# EAGLE board CT_schematic (EAGLE 7.6.0)

Size 100 x 80 mm. Coordinates in mm from the lower left corner, seen from the top.
Outline: 0,0 100,0 100,80 0,80 0,0
Copper layers (1*16): Top 0.035mm / dielectric 1.5mm / Bottom 0.035mm
Design rules "default": minimum track width 10mil, minimum drill 24mil, track to track 8mil, track to pad 8mil, pad to pad 8mil, via to via 8mil, smd to smd 8mil, copper to edge 40mil, drill to drill 8mil, minimum pad ring 10mil, minimum via ring 8mil, stop-mask expansion 4mil, vias tented up to drill 0mil, thermal gap 10mil

## Footprints (pad centres in the part's own frame; a part is rotated, then mirrored left to right if it is on the bottom)
C0603 = smd 0.8 x 0.8: 1 -0.762,0; 2 0.762,0
C0402 = smd 0.5 x 0.5: 1 -0.508,0; 2 0.508,0
C0805 = smd 1.2 x 1.3: 1 -1.016,0; 2 1.016,0
C1210 = smd 1.2 x 2.5: 1 -1.524,0; 2 1.524,0
EXV-9H = smd 3.505 x 1.676: 1 -2.857,0; 2 2.857,0
L0603 = smd 0.8 x 0.8: 1 -0.762,0; 2 0.762,0
PJ-037B_PACKAGE = drill 3.7 square: 1 12,0 | drill 3.2 square: 2 6,0
R0603 = smd 0.8 x 0.8: 1 -0.762,0; 2 0.762,0
LQFP144 = smd 0.35 x 1.35: 1 -8.75,-10.625; 2 -8.25,-10.625; 3 -7.75,-10.625; 4 -7.25,-10.625; 5 -6.75,-10.625; 6 -6.25,-10.625; 7 -5.75,-10.625; 8 -5.25,-10.625; 9 -4.75,-10.625; 10 -4.25,-10.625; 11 -3.75,-10.625; 12 -3.25,-10.625; 13 -2.75,-10.62; 14 -2.25,-10.625; 15 -1.75,-10.625; 16 -1.25,-10.625; 17 -0.75,-10.625; 18 -0.25,-10.625; 19 0.25,-10.625; 20 0.75,-10.625; 21 1.25,-10.625; 22 1.75,-10.625; 23 2.25,-10.625; 24 2.75,-10.62; 25 3.25,-10.625; 26 3.75,-10.625; 27 4.25,-10.625; 28 4.75,-10.625; 29 5.25,-10.625; 30 5.75,-10.625; 31 6.25,-10.625; 32 6.75,-10.625; 33 7.25,-10.625; 34 7.75,-10.625; 35 8.25,-10.625; 36 8.75,-10.625; 73 8.75,10.625; 74 8.25,10.625; 75 7.75,10.625; 76 7.25,10.625; 77 6.75,10.625; 78 6.25,10.625; 79 5.75,10.625; 80 5.25,10.625; 81 4.75,10.625; 82 4.25,10.625; 83 3.75,10.625; 84 3.25,10.625; 85 2.75,10.625; 86 2.25,10.625; 87 1.75,10.625; 88 1.25,10.625; 89 0.75,10.625; 90 0.25,10.625; 91 -0.25,10.625; 92 -0.75,10.625; 93 -1.25,10.625; 94 -1.75,10.625; 95 -2.25,10.625; 96 -2.75,10.625; 97 -3.25,10.625; 98 -3.75,10.625; 99 -4.25,10.625; 100 -4.75,10.625; 101 -5.25,10.625; 102 -5.75,10.625; 103 -6.25,10.625; 104 -6.75,10.625; 105 -7.25,10.625; 106 -7.75,10.625; 107 -8.25,10.625; 108 -8.75,10.625 | smd 1.35 x 0.35: 37 10.625,-8.75; 38 10.625,-8.25; 39 10.625,-7.75; 40 10.625,-7.25; 41 10.625,-6.75; 42 10.625,-6.25; 43 10.625,-5.75; 44 10.625,-5.25; 45 10.625,-4.75; 46 10.625,-4.25; 47 10.625,-3.75; 48 10.625,-3.25; 49 10.625,-2.75; 50 10.625,-2.25; 51 10.625,-1.75; 52 10.625,-1.25; 53 10.625,-0.75; 54 10.625,-0.25; 55 10.625,0.25; 56 10.625,0.75; 57 10.625,1.25; 58 10.625,1.75; 59 10.625,2.25; 60 10.625,2.75; 61 10.625,3.25; 62 10.625,3.75; 63 10.625,4.25; 64 10.625,4.75; 65 10.625,5.25; 66 10.625,5.75; 67 10.625,6.25; 68 10.625,6.75; 69 10.625,7.25; 70 10.625,7.75; 71 10.625,8.25; 72 10.625,8.75; 109 -10.625,8.75; 110 -10.625,8.25; 111 -10.625,7.75; 112 -10.625,7.25; 113 -10.625,6.75; 114 -10.625,6.25; 115 -10.625,5.75; 116 -10.625,5.25; 117 -10.625,4.75; 118 -10.625,4.25; 119 -10.625,3.75; 120 -10.625,3.25; 121 -10.625,2.75; 122 -10.625,2.25; 123 -10.625,1.75; 124 -10.625,1.25; 125 -10.625,0.75; 126 -10.625,0.25; 127 -10.625,-0.25; 128 -10.625,-0.75; 129 -10.625,-1.25; 130 -10.625,-1.75; 131 -10.625,-2.25; 132 -10.625,-2.75; 133 -10.625,-3.25; 134 -10.625,-3.75; 135 -10.625,-4.25; 136 -10.625,-4.75; 137 -10.625,-5.25; 138 -10.625,-5.75; 139 -10.625,-6.25; 140 -10.625,-6.75; 141 -10.625,-7.25; 142 -10.625,-7.75; 143 -10.625,-8.25; 144 -10.625,-8.75
SOT-23-8 = smd 0.4 x 1.2: 1 -0.975,-1.3; 2 -0.325,-1.3; 3 0.325,-1.3; 4 0.975,-1.3; 5 0.975,1.3; 6 0.325,1.3; 7 -0.325,1.3; 8 -0.975,1.3
182-009-MALE = drill 1.194 pad 1.524 octagon: 1 -5.537,10.923; 2 -2.769,10.923; 3 0,10.923; 4 2.769,10.923; 5 5.537,10.923; 6 -4.153,8.08; 7 -1.384,8.08; 8 1.384,8.08; 9 4.153,8.08 | hole 3.048: -12.446,9.501; 12.446,9.501
DFN8-S = smd 0.6 x 0.4: 1 -2.69,1.905; 2 -2.69,0.635; 3 -2.69,-0.635; 4 -2.69,-1.905; 5 2.69,-1.905; 6 2.69,-0.635; 7 2.69,0.635; 8 2.69,1.905
ATBTLC1000-MR110CA = smd 2 x 0.5: 1 -7.2,2.7; 2 -7.2,1.8; 3 -7.2,0.9; 4 -7.2,0; 5 -7.2,-0.9; 6 -7.2,-1.8; 7 -7.2,-2.7; 8 -7.2,-3.6; 17 3.6,-3.6; 18 3.6,-2.7; 19 3.6,-1.8; 20 3.6,-0.9; 21 3.6,0; 22 3.6,0.9; 23 3.6,1.8; 24 3.6,2.7 | smd 0.5 x 2: 9 -4.255,-6.824; 10 -3.355,-6.824; 11 -2.455,-6.824; 12 -1.555,-6.824; 13 -0.655,-6.824; 14 0.245,-6.824; 15 1.145,-6.824; 16 2.045,-6.824 | smd 2.7 x 2.7: 25 -1.261,-0.328
PC28F512P33BFD = smd 0.45 x 0.45: A1 0,0; A2 1,0; A3 2,0; A4 3,0; A5 4,0; A6 5,0; A7 6,0; A8 7,0; B1 0,-1; B2 1,-1; B3 2,-1; B4 3,-1; B5 4,-1; B6 5,-1; B7 6,-1; B8 7,-1; C1 0,-2; C2 1,-2; C3 2,-2; C4 3,-2; C5 4,-2; C6 5,-2; C7 6,-2; C8 7,-2; D1 0,-3; D2 1,-3; D3 2,-3; D4 3,-3; D5 4,-3; D6 5,-3; D7 6,-3; D8 7,-3; E1 0,-4; E2 1,-4; E3 2,-4; E4 3,-4; E5 4,-4; E6 5,-4; E7 6,-4; E8 7,-4; F1 0,-5; F2 1,-5; F3 2,-5; F4 3,-5; F5 4,-5; F6 5,-5; F7 6,-5; F8 7,-5; G1 0,-6; G2 1,-6; G3 2,-6; G4 3,-6; G5 4,-6; G6 5,-6; G7 6,-6; G8 7,-6; H1 0,-7; H2 1,-7; H3 2,-7; H4 3,-7; H5 4,-7; H6 5,-7; H7 6,-7; H8 7,-7
QFN-32 = smd 0.6 x 0.3: 1 -2.3,1.75; 2 -2.3,1.25; 3 -2.3,0.75; 4 -2.3,0.25; 5 -2.3,-0.25; 6 -2.3,-0.75; 7 -2.3,-1.25; 8 -2.3,-1.75; 17 2.3,-1.75; 18 2.3,-1.25; 19 2.3,-0.75; 20 2.3,-0.25; 21 2.3,0.25; 22 2.3,0.75; 23 2.3,1.25; 24 2.3,1.75 | smd 0.3 x 0.6: 9 -1.75,-2.3; 10 -1.25,-2.3; 11 -0.75,-2.3; 12 -0.25,-2.3; 13 0.25,-2.3; 14 0.75,-2.3; 15 1.25,-2.3; 16 1.75,-2.3; 25 1.75,2.3; 26 1.25,2.3; 27 0.75,2.3; 28 0.25,2.3; 29 -0.25,2.3; 30 -0.75,2.3; 31 -1.25,2.3; 32 -1.75,2.3 | smd 3.2 x 3.2: EXP 0,0
SJ-43515TS-SMT-TR = smd 2.2 x 3: 1 0.6,-7.4; 4 3.4,-7.4 | smd 3 x 3: 2 12.8,-7.4; 5 17,-3 | smd 2 x 3: 3 5.3,0; 6 2.5,0 | drill 1.8: P$7 4.5,-3.69; P$8 11.54,-3.69
WM-64PC = drill 0.6 pad 1: 1 -1,0.95; 2 -1,-0.95
ABS07-32.768KHZ-7-T = smd 1.1 x 2.4: 1 -2.5,0; 2 0,0
ABLS-25.000MHZ-B2F-T = smd 5.6 x 2.8: 1 -3.81,0; 2 5.69,0
ASFL1 = smd 1.7 x 1.5: 1 -1.27,-1.1; 2 1.27,-1.1; 3 1.27,1.1; 4 -1.27,1.1
WSON-8 = smd 0.3 x 0.6: 1 -0.75,0; 2 0.05,0; 3 0.85,0; 4 1.65,0; 5 1.65,3.8; 6 0.85,3.8; 7 0.05,3.8; 8 -0.75,3.8 | smd 3 x 2.6: PAD 0.45,1.9
SON-6 = smd 0.55 x 0.3: 1 -0.355,0.5 | smd 0.52 x 0.3: 2 -0.37,0; 3 -0.37,-0.5; 4 0.37,-0.5; 5 0.37,0; 6 0.37,0.5
SW_4-1437565-2 = smd 1.4 x 2.1: 1 -2.23,4.55; 2 -2.23,-4.55; 3 2.23,4.55; 4 2.23,-4.55
LGM67K-G1J2-24-Z = smd 0.8 x 1.4: A -2,0; C 0,0
NC7SZ125M5X = smd 1.3 x 0.7: 1 -1.3,0.95; 2 -1.3,0; 3 -1.3,-0.95; 4 1.3,-0.95; 5 1.3,0.95

## Placement (x,y rotation side)
C1  1e-06  [C0603]  -60.96,78.74 0 top  (outside the outline)
C2  1e-07  [C0603]  -64.77,78.74 0 top  (outside the outline)
C3  1e-07  [C0603]  -68.58,78.74 0 top  (outside the outline)
C4  1e-07  [C0603]  -72.39,78.74 0 top  (outside the outline)
C5  1e-07  [C0603]  -76.2,78.74 0 top  (outside the outline)
C6  1e-07  [C0603]  -80.01,78.74 0 top  (outside the outline)
C7  1e-07  [C0603]  -83.82,78.74 0 top  (outside the outline)
C8  1e-07  [C0603]  -87.63,78.74 0 top  (outside the outline)
C9  1e-07  [C0603]  -91.44,78.74 0 top  (outside the outline)
C10  1e-07  [C0603]  -15.24,83.82 0 top  (outside the outline)
C11  1e-07  [C0603]  -19.05,83.82 0 top  (outside the outline)
C12  1e-07  [C0603]  -22.86,83.82 0 top  (outside the outline)
C13  1e-07  [C0603]  -26.67,83.82 0 top  (outside the outline)
C14  4.7e-06  [C0603]  -49.53,78.74 0 top  (outside the outline)
C15  2.2e-06  [C0603]  -53.34,78.74 0 top  (outside the outline)
C16  2.2e-06  [C0603]  -57.15,78.74 0 top  (outside the outline)
C17  1e-08  [C0603]  -30.48,83.82 0 top  (outside the outline)
C18  1e-06  [C0603]  -34.29,83.82 0 top  (outside the outline)
C19  1e-11  [C0402]  -41.91,88.9 0 top  (outside the outline)
C20  1e-11  [C0402]  -45.72,88.9 0 top  (outside the outline)
C21  1e-11  [C0402]  -49.53,88.9 0 top  (outside the outline)
C22  1e-11  [C0402]  -53.34,88.9 0 top  (outside the outline)
C23  1e-07  [C0402]  -57.15,88.9 0 top  (outside the outline)
C24  1e-08  [C0402]  -60.96,88.9 0 top  (outside the outline)
C25  1e-05  [C0805]  -33.02,72.39 0 top  (outside the outline)
C26  1e-05  [C0805]  -38.1,72.39 0 top  (outside the outline)
C27  1e-07  [C0402]  -64.77,88.9 0 top  (outside the outline)
C28  1e-08  [C0402]  -68.58,88.9 0 top  (outside the outline)
C29  1e-07  [C0402]  -72.39,88.9 0 top  (outside the outline)
C30  1e-08  [C0402]  -76.2,88.9 0 top  (outside the outline)
C31  1e-07  [C0402]  -80.01,88.9 0 top  (outside the outline)
C32  1e-08  [C0402]  -83.82,88.9 0 top  (outside the outline)
C33  1e-06  [C0603]  -38.1,83.82 0 top  (outside the outline)
C34  1e-06  [C0603]  -41.91,83.82 0 top  (outside the outline)
C35  1e-06  [C0603]  -45.72,83.82 0 top  (outside the outline)
C36  1e-06  [C0603]  -49.53,83.82 0 top  (outside the outline)
C37  1e-06  [C0603]  -53.34,83.82 0 top  (outside the outline)
C38  1e-06  [C0603]  -57.15,83.82 0 top  (outside the outline)
C39  1e-06  [C0603]  -60.96,83.82 0 top  (outside the outline)
C40  1e-07  [C0402]  -87.63,88.9 0 top  (outside the outline)
C41  1e-07  [C0402]  -91.44,88.9 0 top  (outside the outline)
C42  1e-07  [C0402]  -95.25,88.9 0 top  (outside the outline)
C43  1e-07  [C0402]  -15.24,93.98 0 top  (outside the outline)
C44  1e-06  [C0603]  -64.77,83.82 0 top  (outside the outline)
C45  1e-08  [C0402]  -19.05,93.98 0 top  (outside the outline)
C46  1e-08  [C0402]  -22.86,93.98 0 top  (outside the outline)
C47  1e-05  [C1210]  -80.01,66.04 0 top  (outside the outline)
C48  1e-05  [C0805]  -43.18,72.39 0 top  (outside the outline)
C49  1e-08  [C0402]  -26.67,93.98 0 top  (outside the outline)
C50  1e-05  [C1210]  -86.36,66.04 0 top  (outside the outline)
C51  1e-05  [C1210]  -92.71,66.04 0 top  (outside the outline)
C52  1e-07  [C0402]  -30.48,93.98 0 top  (outside the outline)
C53  0.0001  [EXV-9H]  -91.44,55.88 0 top  (outside the outline)
C54  0.0001  [EXV-9H]  -17.78,66.04 0 top  (outside the outline)
C55  1e-08  [C0402]  -34.29,93.98 0 top  (outside the outline)
C56  1e-08  [C0402]  -38.1,93.98 0 top  (outside the outline)
F1  240.0  [L0603]  -68.58,83.82 0 top  (outside the outline)
J1  PJ-037B  [PJ-037B_PACKAGE]  -27.94,44.45 0 top  (outside the outline)
R2  1000.0  [R0603]  -72.39,83.82 0 top  (outside the outline)
R4  4700.0  [R0603]  -76.2,83.82 0 top  (outside the outline)
R5  4700.0  [R0603]  -80.01,83.82 0 top  (outside the outline)
R6  2200.0  [R0603]  -83.82,83.82 0 top  (outside the outline)
R7  2200.0  [R0603]  -87.63,83.82 0 top  (outside the outline)
R8  10000.0  [R0603]  -68.58,72.39 0 top  (outside the outline)
R9  120.0  [R0603]  -91.44,83.82 0 top  (outside the outline)
R10  10000.0  [R0603]  -73.66,72.39 0 top  (outside the outline)
R11  10000.0  [R0603]  -78.74,72.39 0 top  (outside the outline)
R12  10000.0  [R0603]  -83.82,72.39 0 top  (outside the outline)
R13  10000.0  [R0603]  -88.9,72.39 0 top  (outside the outline)
R14  10000.0  [R0603]  -93.98,72.39 0 top  (outside the outline)
R15  10000.0  [R0603]  -15.24,78.74 0 top  (outside the outline)
R16  10000.0  [R0603]  -20.32,78.74 0 top  (outside the outline)
R17  10000.0  [R0603]  -25.4,78.74 0 top  (outside the outline)
R18  10000.0  [R0603]  -30.48,78.74 0 top  (outside the outline)
R19  10000.0  [R0603]  -35.56,78.74 0 top  (outside the outline)
R20  1270.0  [R0603]  -15.24,88.9 0 top  (outside the outline)
R21  1270.0  [R0603]  -19.05,88.9 0 top  (outside the outline)
R22  100000.0  [R0603]  -48.26,72.39 0 top  (outside the outline)
R23  200.0  [R0603]  -22.86,88.9 0 top  (outside the outline)
R24  1000.0  [R0603]  -26.67,88.9 0 top  (outside the outline)
R25  100000.0  [R0603]  -53.34,72.39 0 top  (outside the outline)
R26  2231.0  [R0603]  -30.48,88.9 0 top  (outside the outline)
R27  1000.0  [R0603]  -34.29,88.9 0 top  (outside the outline)
R28  10000.0  [R0603]  -40.64,78.74 0 top  (outside the outline)
R29  10000.0  [R0603]  -45.72,78.74 0 top  (outside the outline)
R30  9100.0  [R0603]  -38.1,88.9 0 top  (outside the outline)
R31  680000.0  [R0603]  -58.42,72.39 0 top  (outside the outline)
R32  120000.0  [R0603]  -63.5,72.39 0 top  (outside the outline)
U1  STM32F205ZET7  [LQFP144]  -24.13,11.43 0 top  (outside the outline)
U2  MAX3051EKA+T  [SOT-23-8]  -15.24,72.39 0 top  (outside the outline)
U3  182-009-113R531  [182-009-MALE]  -59.69,6.35 0 top  (outside the outline)
U4  24AA256-I/MF  [DFN8-S]  -85.09,43.18 0 top  (outside the outline)
U5  ATBTLC1000-MR110CA  [ATBTLC1000-MR110CA]  -80.01,8.89 0 top  (outside the outline)
U6  PC28F512P33BFD  [PC28F512P33BFD]  -44.45,48.26 0 top  (outside the outline)
U7  SGTL5000XNAA3  [QFN-32]  -22.86,57.15 0 top  (outside the outline)
U8  SJ-43515TS-SMT-TR  [SJ-43515TS-SMT-TR]  -39.37,33.02 0 top  (outside the outline)
U9  SJ-43515TS-SMT-TR  [SJ-43515TS-SMT-TR]  -67.31,33.02 0 top  (outside the outline)
U10  SJ-43515TS-SMT-TR  [SJ-43515TS-SMT-TR]  -95.25,33.02 0 top  (outside the outline)
U11  WM-64PCT  [WM-64PC]  -72.39,43.18 0 top  (outside the outline)
U12  ABS07-32.768KHZ-7-T  [ABS07-32.768KHZ-7-T]  -59.69,66.04 0 top  (outside the outline)
U13  ABLS-25.000MHZ-B2F-T  [ABLS-25.000MHZ-B2F-T]  -36.83,66.04 0 top  (outside the outline)
U14  ASFL-24.57MHZ-NCS  [ASFL1]  -82.55,55.88 0 top  (outside the outline)
U15  LP3878SDX-ADJ/NOPB  [WSON-8]  -44.45,54.61 0 top  (outside the outline)
U16  LP3878SDX-ADJ/NOPB  [WSON-8]  -64.77,54.61 0 top  (outside the outline)
U17  TPS3895ADRYR  [SON-6]  -40.64,92.71 0 top  (outside the outline)
U18  4-1437565-2  [SW_4-1437565-2]  -60.96,44.45 0 top  (outside the outline)
U19  Q65110A2395  [LGM67K-G1J2-24-Z]  -68.58,66.04 0 top  (outside the outline)
U20  nc7sz125m5x  [NC7SZ125M5X]  -20.32,72.39 0 top  (outside the outline)
U21  nc7sz125m5x  [NC7SZ125M5X]  -26.67,72.39 0 top  (outside the outline)

## Library data of the parts
C1-C56 F1 J1 R2 R4-R32 U1-U21 = circuit_tree

## Nets
CLK_CRYSTAL_U1_8: C19.1 U1.8 U12.1
CLK_CRYSTAL_U1_9: C20.1 U1.9 U12.2
CLK_CRYSTAL_U1_23: C21.1 U1.23 U13.1
CLK_CRYSTAL_U1_24: C22.1 U1.24 U13.2
CLK_U7_21: U7.21 U14.3
GND: C1.2 C2.2 C3.2 C4.2 C5.2 C6.2 C7.2 C8.2 C9.2 C10.2 C11.2 C12.2 C13.2 C14.2 C15.2 C16.2 C17.2 C18.2 C19.2 C20.2 C21.2 C22.2 C23.2 C24.2 C25.2 C26.2 C27.2 C28.2 C29.2 C30.2 C31.2 C32.2 C40.2 C41.2 C42.2 C43.2 C44.2 C45.2 C46.2 C47.2 C48.2 C49.2 C50.2 C51.2 C52.2 C53.2 C54.2 C55.2 C56.2 J1.2 R2.2 R8.2 R11.2 R21.2 R24.2 R27.2 R30.2 R32.2 U1.16 U1.31 U1.38 U1.51 U1.61 U1.83 U1.94 U1.107 U1.120 U1.130 U2.2 U2.8 U3.5 U4.4 U5.1 U5.9 U5.13 U5.24 U5.25 U6.B2 U6.H2 U6.H4 U6.H6 U7.1 U7.3 U7.7 U7.EXP U9.1 U10.1 U11.2 U14.2 U15.3 U15.PAD U16.3 U16.PAD U17.2 U19.C U20.1 U20.3 U21.1 U21.3
NET_U1_25: R5.1 U1.25 U21.4
NET_U1_33: C17.1 C18.1 F1.1 U1.32 U1.33
NET_U1_71: C15.1 U1.71
NET_U1_106: C16.1 U1.106
NET_U1_136: R6.1 U1.136 U4.6
NET_U1_138: R8.1 U1.138
NET_U1_140: R7.1 U1.140 U4.5
NET_U1_141: U19.A
NET_U1_142: U18.3 U18.4
NET_U2_6: R9.2 U2.6
NET_U3_2: R9.2 U2.6 U3.2
NET_U3_3: R9.1 U2.7 U3.3
NET_U4_1: R10.1 U4.1
NET_U4_2: R11.1 U4.2
NET_U4_3: R12.1 U4.3
NET_U5_17: R13.1 U5.17
NET_U5_20: R14.1 U5.20
NET_U6_A4: C31.1 C32.1 U6.A4
NET_U6_C6: R18.1 U6.C6
NET_U6_D4: R4.1 U6.D4 U20.4
NET_U7_10: C43.1 U7.10
NET_U7_29: R20.1 U7.29
NET_U7_31: R21.1 U7.31
NET_U8_1: U7.4 U8.1
NET_U8_2: U7.2 U8.2
NET_U8_5: U7.6 U8.5
NET_U9_2: C34.1 U9.2
NET_U9_5: C33.1 U9.5
NET_U9_11: C34.2
NET_U9_12: C33.2
NET_U10_2: C36.1 C37.1 U10.2
NET_U10_5: C35.1 U10.5
NET_U10_13: C36.2 C37.2
NET_U10_14: C35.2
NET_U11_1: C38.1 C39.1 C44.1 U7.16 U11.1
NET_U11_15: C38.2 C39.2
NET_U15_1: C46.1 U15.1
NET_U15_6: R23.2 R24.1 U15.6
NET_U15_8: R22.1 U15.8
NET_U16_1: C49.1 U16.1
NET_U16_6: R26.2 R27.1 U16.6
NET_U16_8: R25.1 U16.8
NET_U17_1: R29.1 R30.1 U17.1
NET_U17_3: R31.2 R32.1 U17.3
NET_U17_4: R28.1 U17.4 U20.2 U21.2
NET_U18_1: R2.1 U18.1 U18.2
PROC_CAN1_RX: U1.103 U2.4
PROC_CAN1_TX: U1.104 U2.1
PROC_FSMC_A0: U1.10 U6.A1
PROC_FSMC_A1: U1.11 U6.B1
PROC_FSMC_A2: U1.12 U6.C1
PROC_FSMC_A3: U1.13 U6.D1
PROC_FSMC_A4: U1.14 U6.D2
PROC_FSMC_A5: U1.15 U6.A2
PROC_FSMC_A6: U1.50 U6.C2
PROC_FSMC_A7: U1.53 U6.A3
PROC_FSMC_A8: U1.54 U6.B3
PROC_FSMC_A9: U1.55 U6.C3
PROC_FSMC_A10: U1.56 U6.D3
PROC_FSMC_A11: U1.57 U6.C4
PROC_FSMC_A12: U1.87 U6.A5
PROC_FSMC_A13: U1.88 U6.B5
PROC_FSMC_A14: U1.89 U6.C5
PROC_FSMC_A15: U1.90 U6.D7
PROC_FSMC_A16: U1.80 U6.D8
PROC_FSMC_A17: U1.81 U6.A7
PROC_FSMC_A18: U1.82 U6.B7
PROC_FSMC_A19: U1.2 U6.C7
PROC_FSMC_A20: U1.3 U6.C8
PROC_FSMC_A21: U1.4 U6.A8
PROC_FSMC_A22: U1.5 U6.G1
PROC_FSMC_A23: U1.1 U6.H8
PROC_FSMC_A24: U1.128 U6.B6
PROC_FSMC_CLK: U1.117 U6.E6
PROC_FSMC_D0: U1.85 U6.F2
PROC_FSMC_D1: U1.86 U6.E2
PROC_FSMC_D2: U1.114 U6.G3
PROC_FSMC_D3: U1.115 U6.E4
PROC_FSMC_D4: U1.58 U6.E5
PROC_FSMC_D5: U1.59 U6.G5
PROC_FSMC_D6: U1.60 U6.G6
PROC_FSMC_D7: U1.63 U6.H7
PROC_FSMC_D8: U1.64 U6.E1
PROC_FSMC_D9: U1.65 U6.E3
PROC_FSMC_D10: U1.66 U6.F3
PROC_FSMC_D11: U1.67 U6.F4
PROC_FSMC_D12: U1.68 U6.F5
PROC_FSMC_D13: U1.77 U6.H5
PROC_FSMC_D14: U1.78 U6.G7
PROC_FSMC_D15: U1.79 U6.E7
PROC_FSMC_NE1: R16.1 U1.123 U6.B4
PROC_FSMC_NL: R15.1 U1.137 U6.F6
PROC_FSMC_NOE: R17.1 U1.118 U6.F8
PROC_FSMC_NWAIT: U1.122 U6.F7
PROC_FSMC_NWE: R19.1 U1.119 U6.G8
PROC_I2S2_SCK: U1.69 U7.24
PROC_I2S2_SD: U1.29 U7.26
PROC_I2S2_WS: U1.73 U7.23
PROC_SPI1_MISO: U1.42 U5.14
PROC_SPI1_MOSI: U1.43 U5.11
PROC_SPI1_NSS: U1.40 U5.12
PROC_SPI1_SCK: U1.41 U5.10
VCC_S1_13V2: C47.1 C50.1 C53.1 C54.1 J1.1 R22.2 R25.2 U15.4 U16.4
VCC_TIER1_1V2: C40.1 C48.1 R23.1 U7.30 U15.5
VCC_TIER1_3V3: C1.1 C2.1 C3.1 C4.1 C5.1 C6.1 C7.1 C8.1 C9.1 C10.1 C11.1 C12.1 C13.1 C14.1 C23.1 C24.1 C25.1 C26.1 C27.1 C28.1 C29.1 C30.1 C41.1 C42.1 C45.1 C51.1 C52.1 C55.1 C56.1 F1.2 R4.2 R5.2 R6.2 R7.2 R10.2 R12.2 R13.2 R14.2 R15.2 R16.2 R17.2 R18.2 R19.2 R20.2 R26.1 R28.2 R29.2 R31.1 U1.6 U1.17 U1.30 U1.39 U1.52 U1.62 U1.72 U1.84 U1.95 U1.108 U1.121 U1.131 U1.144 U2.3 U4.7 U4.8 U5.6 U5.22 U6.A6 U6.D5 U6.D6 U6.G4 U6.H3 U7.5 U7.20 U14.4 U16.5 U17.6 U20.5 U21.5

## Tracks (layer width: path | path; a pad name or v marks a point on that pad's centre or on a via)
CLK_CRYSTAL_U1_8  (2 unrouted)
CLK_CRYSTAL_U1_9  (2 unrouted)
CLK_CRYSTAL_U1_23  (2 unrouted)
CLK_CRYSTAL_U1_24  (2 unrouted)
CLK_U7_21  (1 unrouted)
GND  (98 unrouted)
NET_U1_25  (2 unrouted)
NET_U1_33  (4 unrouted)
NET_U1_71  (1 unrouted)
NET_U1_106  (1 unrouted)
NET_U1_136  (2 unrouted)
NET_U1_138  (1 unrouted)
NET_U1_140  (2 unrouted)
NET_U1_142  (1 unrouted)
NET_U2_6  (1 unrouted)
NET_U3_2  (2 unrouted)
NET_U3_3  (2 unrouted)
NET_U4_1  (1 unrouted)
NET_U4_2  (1 unrouted)
NET_U4_3  (1 unrouted)
NET_U5_17  (1 unrouted)
NET_U5_20  (1 unrouted)
NET_U6_A4  (2 unrouted)
NET_U6_C6  (1 unrouted)
NET_U6_D4  (2 unrouted)
NET_U7_10  (1 unrouted)
NET_U7_29  (1 unrouted)
NET_U7_31  (1 unrouted)
NET_U8_1  (1 unrouted)
NET_U8_2  (1 unrouted)
NET_U8_5  (1 unrouted)
NET_U9_2  (1 unrouted)
NET_U9_5  (1 unrouted)
NET_U10_2  (2 unrouted)
NET_U10_5  (1 unrouted)
NET_U10_13  (1 unrouted)
NET_U11_1  (4 unrouted)
NET_U11_15  (1 unrouted)
NET_U15_1  (1 unrouted)
NET_U15_6  (2 unrouted)
NET_U15_8  (1 unrouted)
NET_U16_1  (1 unrouted)
NET_U16_6  (2 unrouted)
NET_U16_8  (1 unrouted)
NET_U17_1  (2 unrouted)
NET_U17_3  (2 unrouted)
NET_U17_4  (3 unrouted)
NET_U18_1  (2 unrouted)
PROC_CAN1_RX  (1 unrouted)
PROC_CAN1_TX  (1 unrouted)
PROC_FSMC_A0  (1 unrouted)
PROC_FSMC_A1  (1 unrouted)
PROC_FSMC_A2  (1 unrouted)
PROC_FSMC_A3  (1 unrouted)
PROC_FSMC_A4  (1 unrouted)
PROC_FSMC_A5  (1 unrouted)
PROC_FSMC_A6  (1 unrouted)
PROC_FSMC_A7  (1 unrouted)
PROC_FSMC_A8  (1 unrouted)
PROC_FSMC_A9  (1 unrouted)
PROC_FSMC_A10  (1 unrouted)
PROC_FSMC_A11  (1 unrouted)
PROC_FSMC_A12  (1 unrouted)
PROC_FSMC_A13  (1 unrouted)
PROC_FSMC_A14  (1 unrouted)
PROC_FSMC_A15  (1 unrouted)
PROC_FSMC_A16  (1 unrouted)
PROC_FSMC_A17  (1 unrouted)
PROC_FSMC_A18  (1 unrouted)
PROC_FSMC_A19  (1 unrouted)
PROC_FSMC_A20  (1 unrouted)
PROC_FSMC_A21  (1 unrouted)
PROC_FSMC_A22  (1 unrouted)
PROC_FSMC_A23  (1 unrouted)
PROC_FSMC_A24  (1 unrouted)
PROC_FSMC_CLK  (1 unrouted)
PROC_FSMC_D0  (1 unrouted)
PROC_FSMC_D1  (1 unrouted)
PROC_FSMC_D2  (1 unrouted)
PROC_FSMC_D3  (1 unrouted)
PROC_FSMC_D4  (1 unrouted)
PROC_FSMC_D5  (1 unrouted)
PROC_FSMC_D6  (1 unrouted)
PROC_FSMC_D7  (1 unrouted)
PROC_FSMC_D8  (1 unrouted)
PROC_FSMC_D9  (1 unrouted)
PROC_FSMC_D10  (1 unrouted)
PROC_FSMC_D11  (1 unrouted)
PROC_FSMC_D12  (1 unrouted)
PROC_FSMC_D13  (1 unrouted)
PROC_FSMC_D14  (1 unrouted)
PROC_FSMC_D15  (1 unrouted)
PROC_FSMC_NE1  (2 unrouted)
PROC_FSMC_NL  (2 unrouted)
PROC_FSMC_NOE  (2 unrouted)
PROC_FSMC_NWAIT  (1 unrouted)
PROC_FSMC_NWE  (2 unrouted)
PROC_I2S2_SCK  (1 unrouted)
PROC_I2S2_SD  (1 unrouted)
PROC_I2S2_WS  (1 unrouted)
PROC_SPI1_MISO  (1 unrouted)
PROC_SPI1_MOSI  (1 unrouted)
PROC_SPI1_NSS  (1 unrouted)
PROC_SPI1_SCK  (1 unrouted)
VCC_S1_13V2  (8 unrouted)
VCC_TIER1_1V2  (4 unrouted)
VCC_TIER1_3V3  (77 unrouted)